# Altium PCB Candunio.PcbDoc (part 1 of 2)
Units mm, origin at the board's own origin, x right, y up, seen from the top; angles counter-clockwise.
Board outline 46 x 46 mm, 2 copper layers (Top Layer, Bottom Layer); 43 components, 53 nets, 183 pads, 133 vias.
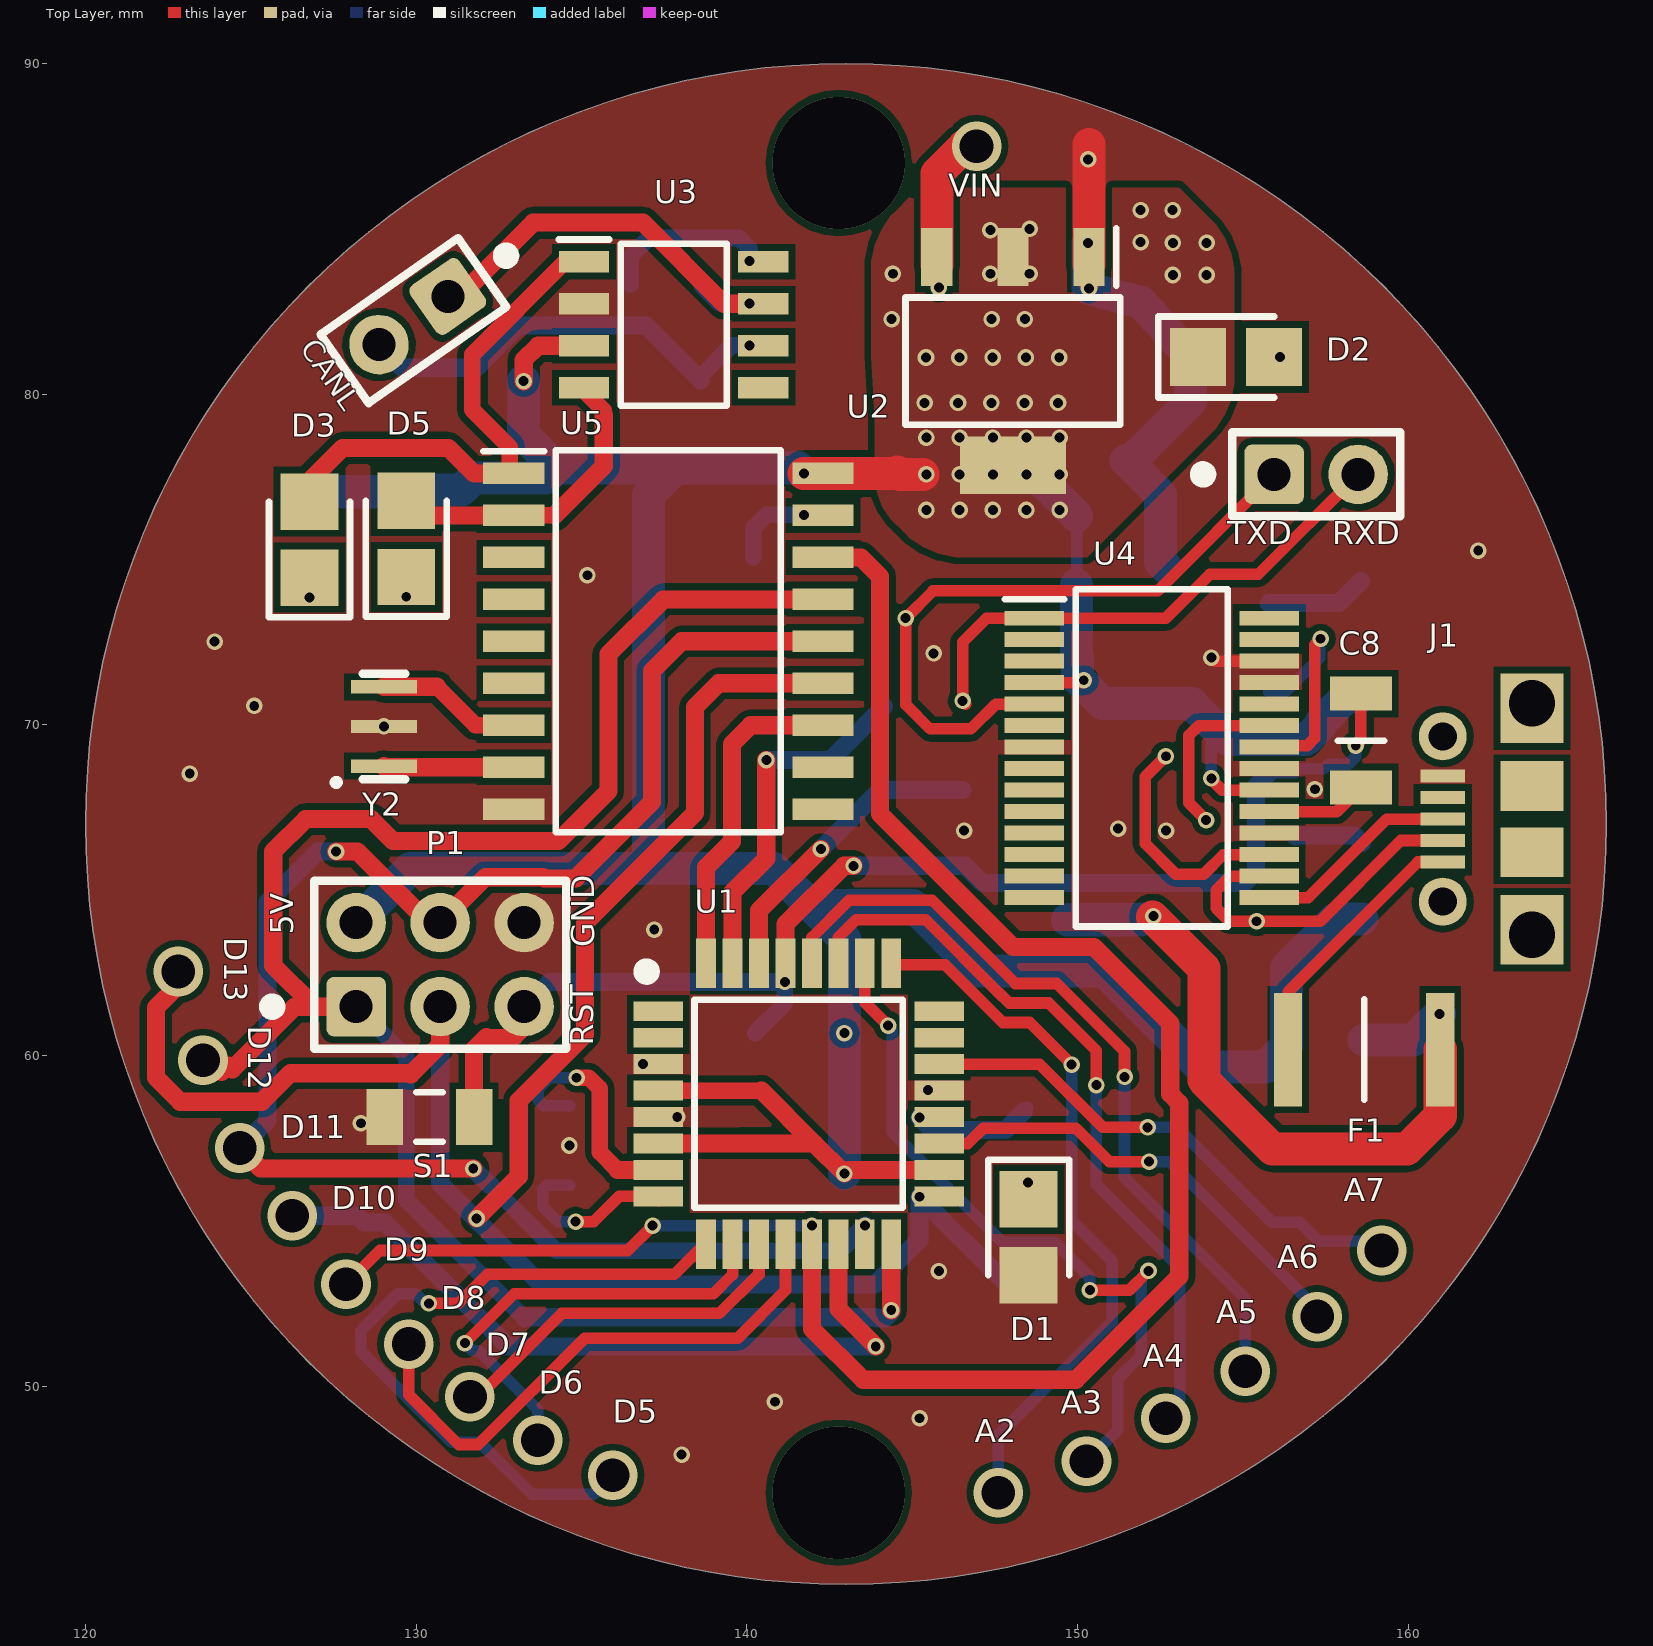
[diagram p0: Top Layer view]
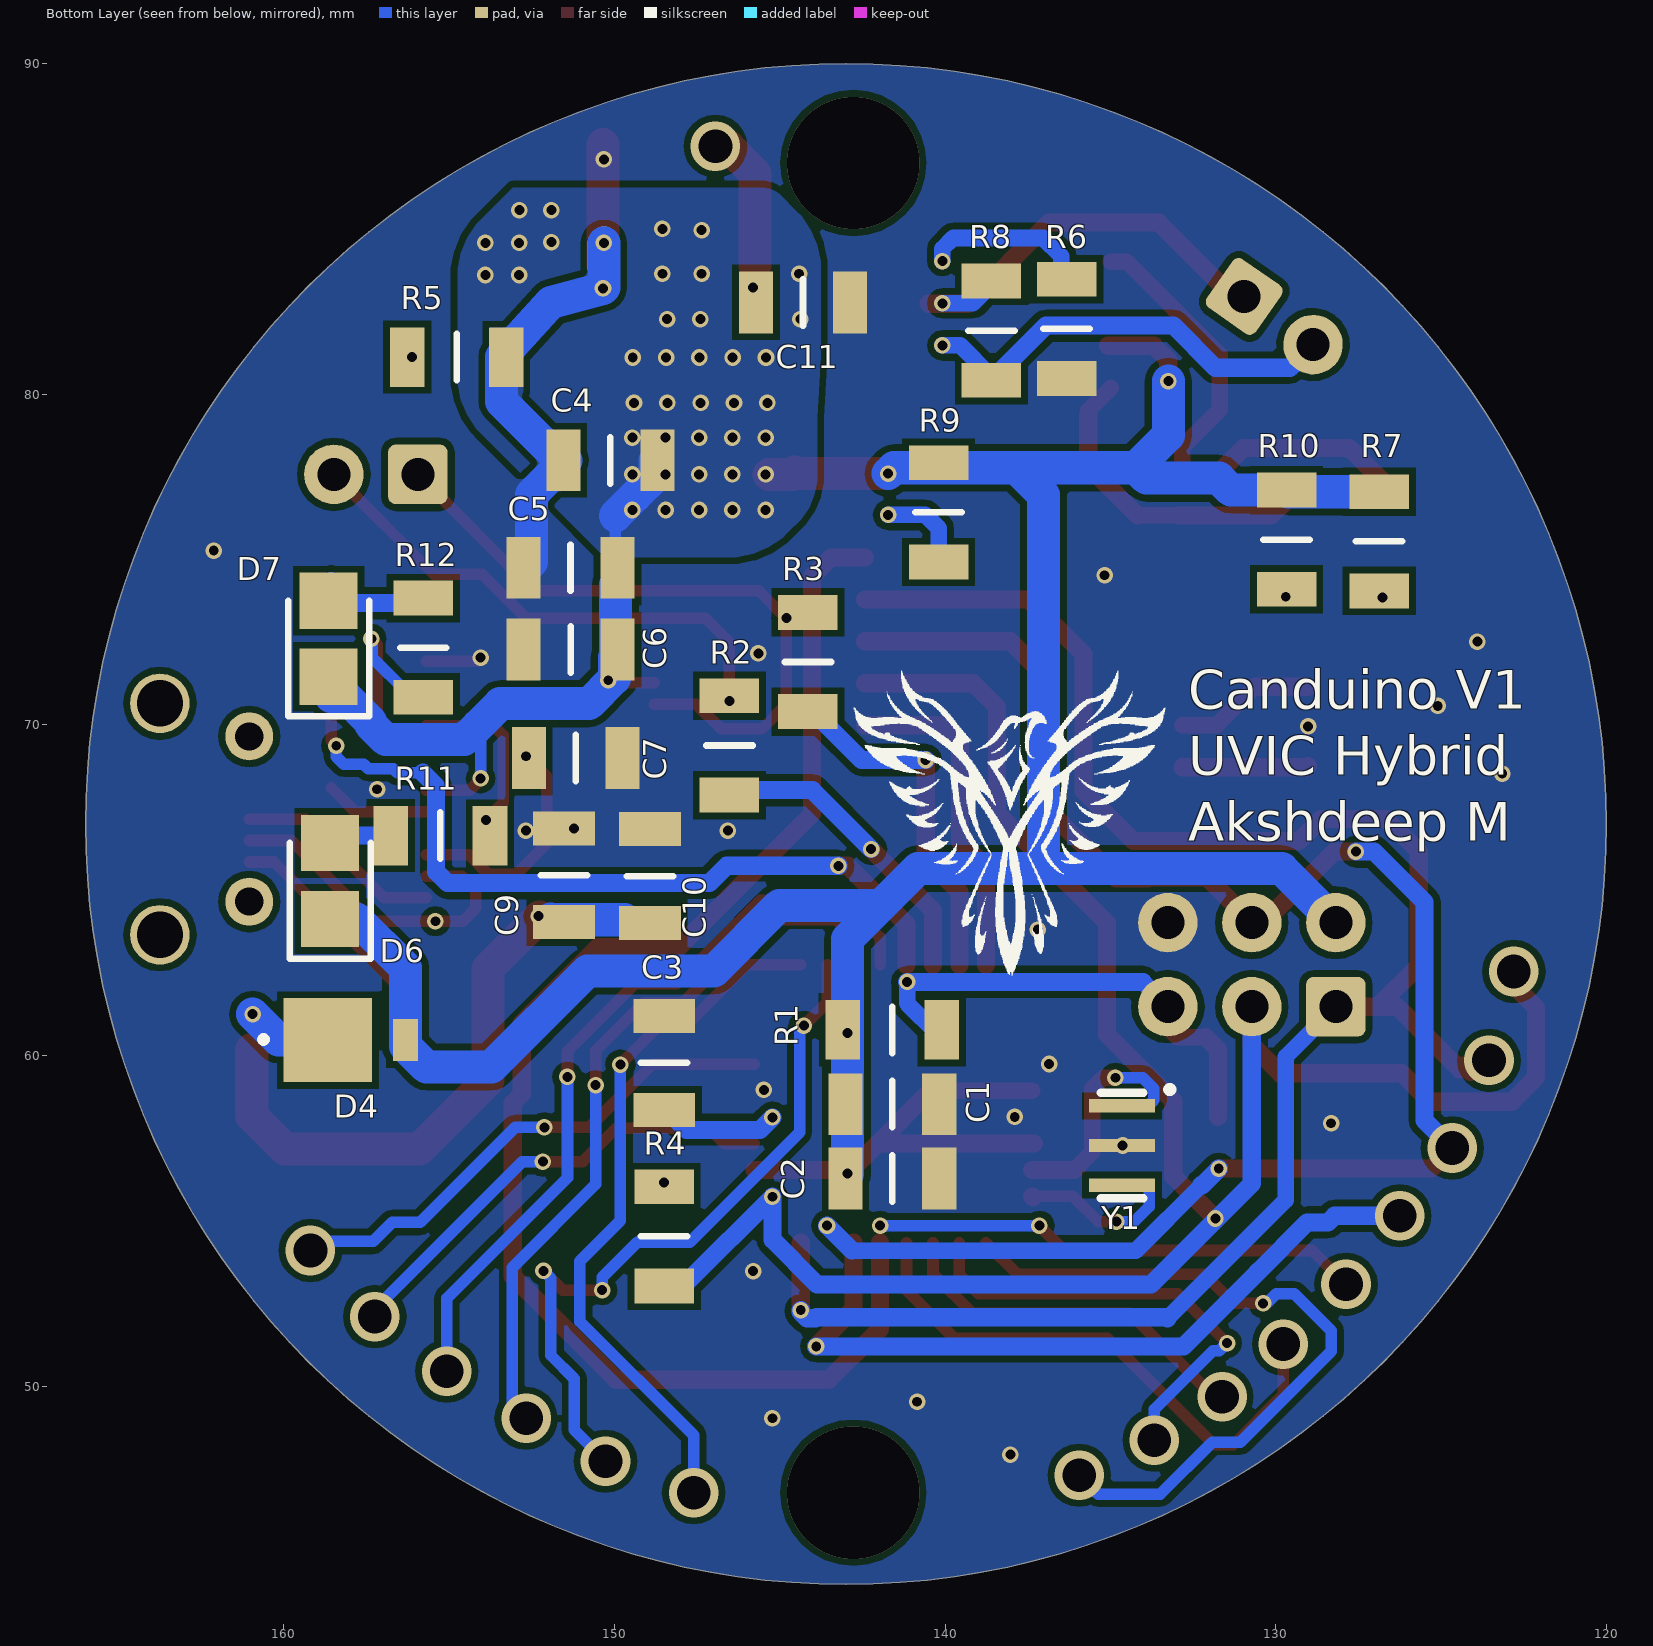
[diagram p1: Bottom Layer view, seen from below]

## Layer stack, top to bottom
Top Solder: solder mask 0.0102, Solder Resist, Dk 3.5
Top Layer: signal copper 0.0356
Dielectric 1: dielectric 0.32, FR-4, Dk 4.8
Bottom Layer: signal copper 0.0356
Bottom Solder: solder mask 0.0102, Solder Resist, Dk 3.5

## Board outline
120,67 cw(c143,67) 143,90 cw(c143,67) 166,67 cw(c143,67) 143,44 cw(c143,67) 120,67

## Design rules (kind name [scope] priority, off if disabled: settings)
Clearance [All] p1: gap=0.2 ignorepadtopadclearanceinfootprint=FALSE
MinimumSolderMaskSliver [All] p1: minsoldermaskwidth=0.07
PlaneConnect [All] p1: planeconnectstyle=Direct reliefexpansion=0.508 reliefentries=4 reliefconductorwidth=0.254 reliefairgap=0.254
PolygonConnect [All] p1: connectstyle=Direct reliefconductorwidth=0.254 reliefentries=4 polygonreliefangle="90 Angle" airgapwidth=0.254
RoutingVias [All] p1: holewidth=0.3 width=0.5 viastyle="Through Hole" minholewidth=0.3 minwidth=0.5 maxholewidth=0.3 maxwidth=0.5 viatemplateguid#1={BD94946F-5F4F-4AE1-884C-F64635037A37} viatemplatename#1=v50h30
SilkToSilkClearance [All] p1: silktosilkclearance=0.07
SilkToSolderMaskClearance [IsPad] p1: minsilkscreentomaskgap=0.07 clearancetoexposedcopper=TRUE
SolderMaskExpansion [All] p1: expansion=0.102
Width [All] p1: maxlimit=1 minlimit=0.35 preferedwidth=0.55
26 further rules are at their usual default settings.

## Components (designator, comment, footprint, x,y, rotation, side; value= is the part's Value field where it differs from the comment)
C1 "Cap Pol3" CAPC3216X170N 141.6,58.525 r180 bottom value=4.7uF
C2 "1uF" CAPC3216X170N 141.6,56.275 r180 bottom
C3 "Cap Semi" CAPC3216X170N 148.5,59.775 r90 bottom value=100nF
C4 "1uF" CAPC3216X170N 150.125,78 r0 bottom
C5 "Cap Pol3" CAPC3216X170N 151.333,74.752 r0 bottom value=4.7uF
C6 "Cap Semi" CAPC3216X170N 151.331,72.275 r0 bottom value=100nF
C7 "Cap Semi" CAPC3216X170N 151.175,69 r180 bottom value=100nF
C8 "Cap Semi" CAPC3216X170N 158.575,69.523 r270 top value=100nF
C9 "Cap Pol3" CAPC3216X170N 151.525,65.45 r90 bottom value=4.7uF
C10 "1uF" CAPC3216X170N 148.925,65.425 r90 bottom
C11 "Cap Pol3" CAPC3216X170N 144.3,82.775 r180 bottom value=4.7uF
CANL "CANOUT" "Pin Header 1x2 TH Pitch 2.54mm" 130.956,82.957 r215 top (schematic designator P3)
D1 "Red" LEDC3216X120NRED 148.525,54.5 r270 top
D2 "Green" LEDC3216X120NGRN 154.8,81.125 r0 top
D3 "Yellow" LEDC3216X120NYEL 126.773,75.6 r90 top
D4 "Diode" DO-220AA 157.976,60.463 r180 bottom
D5 "Yellow" LEDC3216X120NYEL 129.698,75.625 r90 top
D6 "Yellow" LEDC3216X120NYEL 158.605,65.275 r90 bottom
D7 "Yellow" LEDC3216X120NYEL 158.65,72.604 r90 bottom
F1 "Fuse 2" FUSC4632X85N 158.675,60.175 r180 top
J1 "USB micro B" 1050170001 163.75,67.15 r90 top
P1 "ICSP" "Pin Header 2x3 TH Pitch 2.54mm" 128.185,64.015 r0 top
R1 "1K" RESC3216X60N 141.6,60.775 r180 bottom
R2 "1K" RESC3216X60N 146.525,69.375 r90 bottom
R3 "1K" RESC3216X60N 144.15,71.9 r90 bottom
R4 "1K" RESC3216X60N 148.5,54.525 r270 bottom
R5 "1K" RESC3216X60N 154.775,81.125 r180 bottom
R6 "16.9K" RESC3216X60N 136.325,81.975 r90 bottom
R7 "1K" RESC3216X60N 126.873,75.55 r270 bottom
R8 "120" RESC3216X60N 138.6,81.925 r270 bottom
R9 "10K" RESC3216X60N 140.2,76.425 r90 bottom
R10 "1K" RESC3216X60N 129.673,75.6 r90 bottom
R11 "1K" RESC3216X60N 155.27,66.65 r0 bottom
R12 "1K" RESC3216X60N 155.787,72.333 r90 bottom
S1 "SW-PB" C1206 130.4,58.137 r180 top
"TXD    RXD" "Serial" "Pin Header 1x2 TH Pitch 2.54mm" 155.95,77.575 r0 top (schematic designator P2)
U1 "ATmega328P-AU" QFP80P900X900X120-32N 141.569,58.537 r0 top
U2 "LM1117IMPX-5.0" SOT230P700X180-4N 148.05,81 r270 top
U3 "MCP2551-E/SN" SOIC127P600X175-8N 137.787,82.1 r0 top
U4 "FT232RL-Reel" SOP65P780X200-28N 152.25,69 r0 top
U5 "MCP2515-E/ST" SOIC127P1030X265-18N 137.625,72.525 r0 top
Y1 "CSTCE16M0V53-R0" CSTCE_G 134.65,57.276 r90 bottom
Y2 "CSTCE16M0V53-R0" CSTCE_G 129.025,69.95 r270 top

## Footprints (in the part's own frame and the unit in brackets; to place one, negate y for a bottom-side part, rotate by r counter-clockwise, add the part's x,y. Pads: shape width x height; smd on the part's side, far side on the other; paste and mask are expansions set on the pad)
1050170001 [mm] "CONN USB MICRO MOLEX MODIFIED FOR DRILL HITS"
  round 1.8 hole 1.4: 0(-3.5,0) 0(3.5,0)
  rect 2.1x1.9 smd: 0(-3.35,0) 0(3.35,0)
  round 1.45 hole 0.85: 0(-2.5,2.7) 0(2.5,2.7)
  rect 1.5x1.9 smd: 0(-1,0) 0(1,0)
  rect 0.4x1.35 smd: 1(-1.3,2.7) 2(-0.65,2.7) 3(0,2.7) 4(0.65,2.7) 5(1.3,2.7)
  body extent -4.1,-2.5 4.1,2.9, height 2.78
C1206 [mm] "Chip Capacitor, Body 3.2x1.6mm, IPC High Density"
  rect 1.1x1.7 smd: 1(-1.35,0) 2(1.35,0)
  silkscreen extent -0.4,-0.75 0.4,0.75, body extent -1.7,-0.9 1.7,0.9, height 1.3
CAPC3216X170N [mm]
  rect 1.03x1.87 smd: 1(-1.42,0) 2(1.42,0)
  silkscreen extent 0,-0.7 0,0.7, body extent -1.6,-0.8 1.6,0.8, height 1.7
CSTCE_G [mm]
  rect 0.4x2 smd: 1(1.2,0) 2(0,0) 3(-1.2,0)
  silkscreen extent -1.6,-1.52 1.77,0.65, body extent -1.6,-0.65 1.6,0.65, height 0.7
DO-220AA [mil]
  rect 105.12x100 smd: 1(-27.5,0)
  rect 30x50 smd: 2(65.06,0)
  silkscreen extent -107,-2 -102,3, body extent -76,-40 76,40, height 39
FUSC4632X85N [mm]
  rect 0.85x3.43 smd: 1(-2.3,0) 2(2.3,0)
  silkscreen extent 0,-1.52 0,1.52, body extent -2.27,-1.62 2.28,1.62, height 0.85
LEDC3216X120NGRN [mm]
  rect 1.7x1.75 smd: 1(-1.15,0) 2(1.15,0)
  silkscreen extent -2.35,-1.22 1.15,1.22, body extent -1.6,-0.8 1.6,0.8, height 1.1
LEDC3216X120NRED [mm]
  rect 1.7x1.75 smd: 1(-1.15,0) 2(1.15,0)
  silkscreen extent -2.35,-1.22 1.15,1.22, body extent -1.6,-0.8 1.6,0.8, height 1.1
LEDC3216X120NYEL [mm]
  rect 1.7x1.75 smd: 1(-1.15,0) 2(1.15,0)
  silkscreen extent -2.35,-1.22 1.15,1.22, body extent -1.6,-0.8 1.6,0.8, height 1.1
"Pin Header 1x2 TH Pitch 2.54mm" [mm] "PinHeader 1x2 TH Pitch 2.54mm"
  rrect25% 1.8x1.8 hole 1: 1(0,0)
  round 1.8 hole 1: 2(2.54,0)
  silkscreen extent -2.3,-1.27 3.81,1.27, body extent -1.27,-1.27 3.81,1.27, height 9.5
"Pin Header 2x3 TH Pitch 2.54mm" [mm] "PinHeader 1x3 TH Pitch 2.54mm"
  rrect25% 1.8x1.8 hole 1: 1(0,-2.54)
  round 1.8 hole 1: 2(2.54,-2.54) 3(5.08,-2.54) 4(0,0) 5(2.54,0) 6(5.08,0)
  silkscreen extent -2.69,-3.81 6.35,1.27, body extent -1.27,-3.81 6.35,1.27, height 9.5
QFP80P900X900X120-32N [mm]
  rect 1.5x0.6 smd: 1(-4.25,2.8) 2(-4.25,2) 3(-4.25,1.2) 4(-4.25,0.4) 5(-4.25,-0.4) 6(-4.25,-1.2) 7(-4.25,-2) 8(-4.25,-2.8) 17(4.25,-2.8) 18(4.25,-2) 19(4.25,-1.2) 20(4.25,-0.4) 21(4.25,0.4) 22(4.25,1.2) 23(4.25,2) 24(4.25,2.8)
  rect 0.6x1.5 smd: 9(-2.8,-4.25) 10(-2,-4.25) 11(-1.2,-4.25) 12(-0.4,-4.25) 13(0.4,-4.25) 14(1.2,-4.25) 15(2,-4.25) 16(2.8,-4.25) 25(2.8,4.25) 26(2,4.25) 27(1.2,4.25) 28(0.4,4.25) 29(-0.4,4.25) 30(-1.2,4.25) 31(-2,4.25) 32(-2.8,4.25)
  silkscreen extent -4.8,-3.15 3.15,4.2, body extent -4.5,-4.5 4.5,4.5, height 1.2
RESC3216X60N [mm]
  rect 1.05x1.8 smd: 1(-1.5,0) 2(1.5,0)
  silkscreen extent 0,-0.7 0,0.7, body extent -1.57,-0.83 1.58,0.77, height 1.2
SOIC127P600X175-8N [mm]
  rect 1.525x0.65 smd: 1(-2.712,1.905) 2(-2.712,0.635) 3(-2.712,-0.635) 4(-2.712,-1.905) 5(2.712,-1.905) 6(2.712,-0.635) 7(2.712,0.635) 8(2.712,1.905)
  silkscreen extent -3.47,-2.45 1.6,2.58, body extent -3,-2.45 3,2.45, height 1.75
SOIC127P1030X265-18N [mm]
  rect 1.85x0.65 smd: 1(-4.675,5.08) 2(-4.675,3.81) 3(-4.675,2.54) 4(-4.675,1.27) 5(-4.675,0) 6(-4.675,-1.27) 7(-4.675,-2.54) 8(-4.675,-3.81) 9(-4.675,-5.08) 10(4.675,-5.08) 11(4.675,-3.81) 12(4.675,-2.54) 13(4.675,-1.27) 14(4.675,0) 15(4.675,1.27) 16(4.675,2.54) 17(4.675,3.81) 18(4.675,5.08)
  silkscreen extent -5.6,-5.77 3.4,5.77, body extent -5.15,-5.77 5.15,5.78, height 2.65
SOP65P780X200-28N [mm]
  rect 1.8x0.45 smd: 1(-3.55,4.225) 2(-3.55,3.575) 3(-3.55,2.925) 4(-3.55,2.275) 5(-3.55,1.625) 6(-3.55,0.975) 7(-3.55,0.325) 8(-3.55,-0.325) 9(-3.55,-0.975) 10(-3.55,-1.625) 11(-3.55,-2.275) 12(-3.55,-2.925) 13(-3.55,-3.575) 14(-3.55,-4.225) 15(3.55,-4.225) 16(3.55,-3.575) 17(3.55,-2.925) 18(3.55,-2.275) 19(3.55,-1.625) 20(3.55,-0.975) 21(3.55,-0.325) 22(3.55,0.325) 23(3.55,0.975) 24(3.55,1.625) 25(3.55,2.275) 26(3.55,2.925) 27(3.55,3.575) 28(3.55,4.225)
  silkscreen extent -4.45,-5.1 2.3,5.1, body extent -3.9,-5.1 3.9,5.1, height 2
SOT230P700X180-4N [mm]
  rect 1.75x0.95 smd: 1(-3.15,2.3) 2(-3.15,0) 3(-3.15,-2.3)
  rect 1.75x3.2 smd: 4(3.15,0)
  silkscreen extent -4.03,-3.25 1.92,3.25, body extent -3.64,-3.35 3.65,3.35, height 1.81

## Part data
C1 C5 C9 C11: "Polarized Capacitor (Surface Mount)", Capacitance=4.7uF, Case/Package=1206, Case Code (Metric)=3216, Dielectric=X7R, Manufacturer="Kyocera AVX", Manufacturer Part Number=12063C475KAT2A, Max Operating Temperature=125°C, Min Operating Temperature=-55°C, Package Quantity=1, Supplier Part Number=1276-1055-1-ND, Tolerance=10%, Voltage=25V, Case Code (Imperial)=1206, ComponentLink1Description=https://datasheet.ciiva.com/2988/cx7r-2988115.pdf, ComponentLink1URL=https://datasheet.ciiva.com/2988/cx7r-2988115.pdf, ComponentLink2Description=https://datasheet.ciiva.com/7833/84526-7833366.pdf, ComponentLink2URL=https://datasheet.ciiva.com/7833/84526-7833366.pdf, ComponentLink3Description=https://datasheet.ciiva.com/16315/cx7r-16315830.pdf, ComponentLink3URL=https://datasheet.ciiva.com/16315/cx7r-16315830.pdf, ComponentLink4Description=https://datasheet.ciiva.com/153/cx7r-153207.pdf, ComponentLink4URL=https://datasheet.ciiva.com/153/cx7r-153207.pdf, ComponentLink5Description=https://datasheet.ciiva.com/7833/84526-7833367.pdf, ComponentLink5URL=https://datasheet.ciiva.com/7833/84526-7833367.pdf, ComponentLink6Description=https://datasheet.ciiva.com/153/cx7r-153208.pdf, ComponentLink6URL=https://datasheet.ciiva.com/153/cx7r-153208.pdf, ComponentLink7Description=https://datasheet.ciiva.com/7833/cx7r-7833368.pdf, ComponentLink7URL=https://datasheet.ciiva.com/7833/cx7r-7833368.pdf, ComponentLink8Description=https://datasheet.ciiva.com/153/cx7r-153209.pdf, ComponentLink8URL=https://datasheet.ciiva.com/153/cx7r-153209.pdf, ComponentLink9Description=https://datasheet.ciiva.com/5417/cx7r-218113-5417949.pdf, ComponentLink9URL=https://datasheet.ciiva.com/5417/cx7r-218113-5417949.pdf, ComponentLink10Description=https://datasheet.ciiva.com/28611/cx7r-28611725.pdf, ComponentLink10URL=https://datasheet.ciiva.com/28611/cx7r-28611725.pdf, ComponentLink11Description=https://datasheet.ciiva.com/11786/0900766b80dc2409-11786382.pdf, ComponentLink11URL=https://datasheet.ciiva.com/11786/0900766b80dc2409-11786382.pdf, Contact Plating=Tin,Matte, Depth=1.6mm, Height=1.78mm, LatestRevisionDate=29-May-2009, LatestRevisionNote="IPC-7351 Footprint Added.", Lead Free="Lead Free", Length=3.2mm, Mount="Surface Mount", Number of Pins=2, PackageDescription="Chip Capacitor", PackageReference=C0805, Packaging="Tape and Reel", Pricing 1="1=0.5, 10=0.345, 100=0.207, 500=0.15526, 1000=0.1311 (USD)", Published=8-Jun-2000, Publisher="Altium Limited", Radiation Hardening=No, REACH SVHC="No SVHC", Stock 1=0, Supplier 1=Digi-Key, Supplier 2=Digi-Key, Termination=SMD/SMT, Thickness=0.07inch, Voltage Rating=25V, Voltage Rating (DC)=25V, Width=0.063inch
C2 C4 C10: library part "Cap Semi", "Capacitor (Semiconductor SIM Model)", Case/Package=1206, Case Code (Metric)=3216, Dielectric=X7R, Manufacturer=Murata, Manufacturer Part Number=GRM31MR71H105KA88L, Max Operating Temperature=125°C, Min Operating Temperature=-55°C, Package Quantity=1, Supplier Part Number=1276-3086-1-ND, Tolerance=10%, Voltage=50V, Capacitance=1uF, Case Code (Imperial)=1206, ComponentLink1Description=https://datasheet.ciiva.com/16379/product-16379616.pdf, ComponentLink1URL=https://datasheet.ciiva.com/16379/product-16379616.pdf, ComponentLink2Description=https://datasheet.ciiva.com/14116/nmgrm-data-en-14116709.pdf, ComponentLink2URL=https://datasheet.ciiva.com/14116/nmgrm-data-en-14116709.pdf, ComponentLink3Description=https://datasheet.ciiva.com/22703/608985-22703384.pdf, ComponentLink3URL=https://datasheet.ciiva.com/22703/608985-22703384.pdf, ComponentLink4Description=https://datasheet.ciiva.com/3777/42grm31mr71h105ka8823-3777081.pdf, ComponentLink4URL=https://datasheet.ciiva.com/3777/42grm31mr71h105ka8823-3777081.pdf, ComponentLink5Description=https://datasheet.ciiva.com/6270/partnumbering-e-01-6270398.pdf, ComponentLink5URL=https://datasheet.ciiva.com/6270/partnumbering-e-01-6270398.pdf, ComponentLink6Description=https://datasheet.ciiva.com/6270/partnumbering-e-01-6270399.pdf, ComponentLink6URL=https://datasheet.ciiva.com/6270/partnumbering-e-01-6270399.pdf, ComponentLink7Description=https://datasheet.ciiva.com/29199/455056-da-01-en-vs-kondensator-1206-29199449.pdf, ComponentLink7URL=https://datasheet.ciiva.com/29199/455056-da-01-en-vs-kondensator-1206-29199449.pdf, ComponentLink8Description=https://datasheet.ciiva.com/29202/450923-da-01-de-vs-chip-kond-1206-1-0-uf-10pr-50-0v-x7r-29202718.pdf, ComponentLink8URL=https://datasheet.ciiva.com/29202/450923-da-01-de-vs-chip-kond-1206-1-0-uf-10pr-50-0v-x7r-29202718.pdf, Depth=1.6mm, Height=1.15mm, LatestRevisionDate=29-May-2009, LatestRevisionNote="IPC-7351 Footprint Added.", Lead Free="Lead Free", Length=3.2mm, Material=Ceramic, Mount="Surface Mount", Number of Pins=2, PackageDescription="Chip Capacitor", PackageReference=C1206, Packaging="Tape and Reel", Published=8-Jun-2000, Publisher="Altium Limited", REACH SVHC="No SVHC", Stock 1=0, Supplier 1=Digi-Key, Supplier 2=Digi-Key, Termination=SMD/SMT, Thickness=0.049inch, Voltage Rating=50V, Voltage Rating (DC)=50V, Width=0.063inch
C3 C6 C7 C8: "Capacitor (Semiconductor SIM Model)", Capacitance=100nF, Case/Package=1206, Case Code (Metric)=3216, Dielectric=X7R, Dielectric Material=Ceramic, Manufacturer=Yageo, Manufacturer Part Number=CC1206KKX7R0BB104, Max Operating Temperature=125°C, Min Operating Temperature=-55°C, Package Quantity=1, Supplier Part Number=1276-1151-1-ND, Tolerance=10%, Voltage=63V, Voltage Rating=100V, Case Code (Imperial)=1206, ComponentLink1Description=https://datasheet.ciiva.com/180/mlccorderingcode-180144.pdf, ComponentLink1URL=https://datasheet.ciiva.com/180/mlccorderingcode-180144.pdf, ComponentLink2Description=https://datasheet.ciiva.com/180/mlccorderingcode-180145.pdf, ComponentLink2URL=https://datasheet.ciiva.com/180/mlccorderingcode-180145.pdf, ComponentLink3Description=https://datasheet.ciiva.com/180/mlccorderingcode-180146.pdf, ComponentLink3URL=https://datasheet.ciiva.com/180/mlccorderingcode-180146.pdf, ComponentLink4Description=https://datasheet.ciiva.com/7978/1447671-7978227.pdf, ComponentLink4URL=https://datasheet.ciiva.com/7978/1447671-7978227.pdf, ComponentLink5Description=https://datasheet.ciiva.com/5425/upy-gp-np0-16v-to-50v-8-5425573.pdf, ComponentLink5URL=https://datasheet.ciiva.com/5425/upy-gp-np0-16v-to-50v-8-5425573.pdf, ComponentLink6Description=https://datasheet.ciiva.com/26829/getdatasheetpartid-403790-26829655.pdf, ComponentLink6URL=https://datasheet.ciiva.com/26829/getdatasheetpartid-403790-26829655.pdf, ComponentLink7Description=https://datasheet.ciiva.com/46391/1919308-46391993.pdf, ComponentLink7URL=https://datasheet.ciiva.com/46391/1919308-46391993.pdf, ComponentLink8Description=https://datasheet.ciiva.com/16981/upy-np0x7r-mv-100-to-630v-9-16981180.pdf, ComponentLink8URL=https://datasheet.ciiva.com/16981/upy-np0x7r-mv-100-to-630v-9-16981180.pdf, Composition=Ceramic, Depth=1.6mm, Height=1.25mm, LatestRevisionDate=29-May-2009, LatestRevisionNote="IPC-7351 Footprint Added.", Lead Free="Lead Free", Length=3.2mm, Mount="Surface Mount", Number of Pins=2, PackageDescription="Chip Capacitor", PackageReference=C1206, Packaging="Tape and Reel", Pricing 1="1=0.32, 10=0.221, 100=0.1117, 500=0.07646, 1000=0.06763 (USD)", Published=8-Jun-2000, Publisher="Altium Limited", Radiation Hardening=No, REACH SVHC="No SVHC", Stock 1=0, Supplier 1=Digi-Key, Supplier 2=Digi-Key, Termination=SMD/SMT, Thickness=0.057inch, Voltage Rating (DC)=100V, Width=0.063inch
CANL "TXD    RXD": library part "Header 2", "Header, 2-Pin", LatestRevisionDate=17-Jul-2002, LatestRevisionNote="Re-released for DXP Platform.", Publisher="Altium Limited"
D1: library part LED2, "Typical RED, GREEN, YELLOW, AMBER GaAs LED", Case/Package=1206, Case Code (Metric)=3216, Colour=Yellow, Forward Current=20mA, Forward Voltage=2.1V, Lens Colour=White,Clear, Manufacturer="Broadcom Avago", Manufacturer Part Number=HSMY-C150, Max Operating Temperature=85°C, Max Power Dissipation=65mW, Min Operating Temperature=-40°C, Package Quantity=1, Reverse Voltage=5V, Supplier Part Number=732-4992-1-ND, Case Code (Imperial)=1206, ComponentLink1Description=https://datasheet.ciiva.com/15117/getdatasheetpartid-110528-15117488.pdf, ComponentLink1URL=https://datasheet.ciiva.com/15117/getdatasheetpartid-110528-15117488.pdf, ComponentLink2Description=https://datasheet.ciiva.com/11774/0900766b804a6539-11774578.pdf, ComponentLink2URL=https://datasheet.ciiva.com/11774/0900766b804a6539-11774578.pdf, ComponentLink3Description=https://datasheet.ciiva.com/19466/1557071-19466435.pdf, ComponentLink3URL=https://datasheet.ciiva.com/19466/1557071-19466435.pdf, ComponentLink4Description=https://datasheet.ciiva.com/14172/swseriehsmx-c150toc190-e-14172159.pdf, ComponentLink4URL=https://datasheet.ciiva.com/14172/swseriehsmx-c150toc190-e-14172159.pdf, ComponentLink5Description=https://datasheet.ciiva.com/29280/180507-da-01-en-chip-led-hsmy-c150-gelb-29280997.pdf, ComponentLink5URL=https://datasheet.ciiva.com/29280/180507-da-01-en-chip-led-hsmy-c150-gelb-29280997.pdf, ComponentLink6Description=https://datasheet.ciiva.com/11773/0900766b804a6539-11773956.pdf, ComponentLink6URL=https://datasheet.ciiva.com/11773/0900766b804a6539-11773956.pdf, ComponentLink7Description=https://datasheet.ciiva.com/15117/getdatasheetpartid-142358-15117749.pdf, ComponentLink7URL=https://datasheet.ciiva.com/15117/getdatasheetpartid-142358-15117749.pdf, ComponentLink8Description=https://datasheet.ciiva.com/46426/313031-46426533.pdf, ComponentLink8URL=https://datasheet.ciiva.com/46426/313031-46426533.pdf, ComponentLink9Description=https://datasheet.ciiva.com/14172/swseriehsmx-c150toc190-e-14172156.pdf, ComponentLink9URL=https://datasheet.ciiva.com/14172/swseriehsmx-c150toc190-e-14172156.pdf, ComponentLink10Description=https://datasheet.ciiva.com/29281/180509-da-01-en-chip-led-hsmh-c150-rot-29281009.pdf, ComponentLink10URL=https://datasheet.ciiva.com/29281/180509-da-01-en-chip-led-hsmh-c150-rot-29281009.pdf, Contact Plating=Gold, Depth=1.6mm, Dominant Wavelength=586nm, Height=1.1mm, Illumination Colour=Yellow, LatestRevisionDate=17-Jul-2002, LatestRevisionNote="Re-released for DXP Platform.", Lead Free="Lead Free", Length=3.2mm, Lens Style=Diffused,Colorless,Rectangular, Lens Transparency=Diffused, Luminous Intensity=8mcd, Mount="Surface Mount", Number of Elements=1, Number of LEDs=1, Number of Pins=2, PackageDescription="SM LED; 2 Flat Leads", PackageReference=3.2X1.6X1.1, PackageVersion=Feb-2002, Packaging="Tape and Reel", Power Dissipation=65mW, Power Rating=65mW, Published=8-Jun-2000, Publisher="Altium Limited", Radiation Hardening=No, REACH SVHC="No SVHC", Stock 1=0, Stock 2=0, Supplier 1=Digi-Key, Supplier 2=Digi-Key, Supplier 3=Digi-Key, Supplier 4=Digi-Key, Test Current=20mA, Viewing Angle=170°, Voltage Rating (DC)=2.1V, Wavelength=586nm, Width=1.6mm
D2: library part LED2, "Typical RED, GREEN, YELLOW, AMBER GaAs LED", Case/Package=1206, Case Code (Metric)=3216, Colour=Green,Yellow, Forward Current=20mA, Forward Voltage=2.2V, Lens Colour=White,Clear, Manufacturer="Broadcom Avago", Manufacturer Part Number=HSMG-C150, Max Operating Temperature=85°C, Max Power Dissipation=65mW, Min Operating Temperature=-30°C, Package Quantity=1, Reverse Voltage=5V, Supplier Part Number=732-4993-1-ND, Case Code (Imperial)=1206, ComponentLink1Description=https://datasheet.ciiva.com/11774/0900766b804a6539-11774272.pdf, ComponentLink1URL=https://datasheet.ciiva.com/11774/0900766b804a6539-11774272.pdf, ComponentLink2Description=https://datasheet.ciiva.com/14172/swseriehsmx-c150toc190-e-14172162.pdf, ComponentLink2URL=https://datasheet.ciiva.com/14172/swseriehsmx-c150toc190-e-14172162.pdf, ComponentLink3Description=https://datasheet.ciiva.com/46426/313031-46426517.pdf, ComponentLink3URL=https://datasheet.ciiva.com/46426/313031-46426517.pdf, ComponentLink4Description=https://datasheet.ciiva.com/15117/getdatasheetpartid-110366-15117482.pdf, ComponentLink4URL=https://datasheet.ciiva.com/15117/getdatasheetpartid-110366-15117482.pdf, ComponentLink5Description=https://datasheet.ciiva.com/19466/1556369-19466015.pdf, ComponentLink5URL=https://datasheet.ciiva.com/19466/1556369-19466015.pdf, ComponentLink6Description=https://datasheet.ciiva.com/29280/180668-da-01-en-chip-led-hsmg-c150-gelb-gruen-29280632.pdf, ComponentLink6URL=https://datasheet.ciiva.com/29280/180668-da-01-en-chip-led-hsmg-c150-gelb-gruen-29280632.pdf, Contact Plating=Gold, Depth=1.6mm, Dominant Wavelength=572nm, Height=1.1mm, Illumination Colour=Green, LatestRevisionDate=17-Jul-2002, LatestRevisionNote="Re-released for DXP Platform.", Length=3.2mm, Lens Style=Diffused,Colorless,Rectangular, Lens Transparency=Diffused, Luminous Intensity=15mcd, Mount="Surface Mount", Number of Elements=1, Number of LEDs=1, Number of Pins=2, PackageDescription="SM LED; 2 Flat Leads", PackageReference=3.2X1.6X1.1, PackageVersion=Feb-2002, Packaging="Tape and Reel", Power Dissipation=65mW, Power Rating=65mW, Published=8-Jun-2000, Publisher="Altium Limited", Radiation Hardening=No, REACH SVHC="No SVHC", Supplier 1=Digi-Key, Supplier 2=Digi-Key, Test Current=20mA, Viewing Angle=170°, Wavelength=572nm, Width=1.6mm
D3 D5 D6 D7: library part LED2, "Typical RED, GREEN, YELLOW, AMBER GaAs LED", Case/Package=1206, Case Code (Metric)=3216, Forward Current=20mA, Forward Voltage=2.1V, Lens Colour=White,Clear, Manufacturer="Broadcom Avago", Manufacturer Part Number=HSMY-C150, Max Operating Temperature=85°C, Max Power Dissipation=65mW, Min Operating Temperature=-40°C, Package Quantity=1, Reverse Voltage=5V, Supplier Part Number=732-4994-1-ND, Case Code (Imperial)=1206, Colour=Yellow, ComponentLink1Description=https://datasheet.ciiva.com/15117/getdatasheetpartid-110528-15117488.pdf, ComponentLink1URL=https://datasheet.ciiva.com/15117/getdatasheetpartid-110528-15117488.pdf, ComponentLink2Description=https://datasheet.ciiva.com/11774/0900766b804a6539-11774578.pdf, ComponentLink2URL=https://datasheet.ciiva.com/11774/0900766b804a6539-11774578.pdf, ComponentLink3Description=https://datasheet.ciiva.com/19466/1557071-19466435.pdf, ComponentLink3URL=https://datasheet.ciiva.com/19466/1557071-19466435.pdf, ComponentLink4Description=https://datasheet.ciiva.com/14172/swseriehsmx-c150toc190-e-14172159.pdf, ComponentLink4URL=https://datasheet.ciiva.com/14172/swseriehsmx-c150toc190-e-14172159.pdf, ComponentLink5Description=https://datasheet.ciiva.com/29280/180507-da-01-en-chip-led-hsmy-c150-gelb-29280997.pdf, ComponentLink5URL=https://datasheet.ciiva.com/29280/180507-da-01-en-chip-led-hsmy-c150-gelb-29280997.pdf, Contact Plating=Gold, Depth=1.6mm, Dominant Wavelength=586nm, Height=1.1mm, Illumination Colour=Yellow, LatestRevisionDate=17-Jul-2002, LatestRevisionNote="Re-released for DXP Platform.", Lead Free="Lead Free", Length=3.2mm, Lens Style=Diffused,Colorless,Rectangular, Lens Transparency=Diffused, Luminous Intensity=8mcd, Mount="Surface Mount", Number of Elements=1, Number of LEDs=1, Number of Pins=2, PackageDescription="SM LED; 2 Flat Leads", PackageReference=3.2X1.6X1.1, PackageVersion=Feb-2002, Packaging="Tape and Reel", Power Dissipation=65mW, Power Rating=65mW, Published=8-Jun-2000, Publisher="Altium Limited", Radiation Hardening=No, REACH SVHC="No SVHC", Stock 1=0, Supplier 1=Digi-Key, Supplier 2=Digi-Key, Test Current=20mA, Viewing Angle=170°, Voltage Rating (DC)=2.1V, Wavelength=586nm, Width=1.6mm
D4: "Default Diode", Supplier Part Number=SS1P3L-M3/84AGICT-ND, Code_JEDEC=DO-214-AB, LatestRevisionDate=17-Jul-2002, LatestRevisionNote="Re-released for DXP Platform.", PackageDescription="DO-214-AB/SMC; 2 C-Bend Leads; Body 7.9 x 5.9 mm, inc. leads (LxW)", PackageReference=SMC, PackageVersion=Sep-1996, Published=8-Jun-2000, Publisher="Altium Limited", Supplier 1=Digi-Key, Supplier 2=Digi-Key
F1: "Fuse", Case/Package=1812, Case Code (Metric)=4532, Current Rating=100A, Hold Current=500mA, Manufacturer=Bourns, Manufacturer Part Number=MF-MSMF050-2, Max Operating Temperature=85°C, Min Operating Temperature=-40°C, Operating Supply Voltage=15V, Package Quantity=2000, Power Dissipation=800mW, Resistance=150mR, Supplier Part Number=?MF-MSMF050-2CT-ND, Trip Current=1A, Approvals=UL,CSA,TUV, Case Code (Imperial)=1812, ComponentLink1Description=https://datasheet.ciiva.com/326/mfmsmf-326354.pdf, ComponentLink1URL=https://datasheet.ciiva.com/326/mfmsmf-326354.pdf, ComponentLink2Description=https://datasheet.ciiva.com/1228/1786007-1228155.pdf, ComponentLink2URL=https://datasheet.ciiva.com/1228/1786007-1228155.pdf, ComponentLink3Description=https://datasheet.ciiva.com/16205/mfmsmf-16205994.pdf, ComponentLink3URL=https://datasheet.ciiva.com/16205/mfmsmf-16205994.pdf, ComponentLink4Description=https://datasheet.ciiva.com/34302/1164200-34302041.pdf, ComponentLink4URL=https://datasheet.ciiva.com/34302/1164200-34302041.pdf, ComponentLink5Description=https://datasheet.ciiva.com/14537/70153434-14537737.pdf, ComponentLink5URL=https://datasheet.ciiva.com/14537/70153434-14537737.pdf, ComponentLink6Description=https://datasheet.ciiva.com/46395/1695373-46395287.pdf, ComponentLink6URL=https://datasheet.ciiva.com/46395/1695373-46395287.pdf, ComponentLink7Description=https://datasheet.ciiva.com/22749/1695373-22749079.pdf, ComponentLink7URL=https://datasheet.ciiva.com/22749/1695373-22749079.pdf, ComponentLink8Description=https://datasheet.ciiva.com/32426/mf-msmf-series-eng-tds-32426126.pdf, ComponentLink8URL=https://datasheet.ciiva.com/32426/mf-msmf-series-eng-tds-32426126.pdf, ComponentLink9Description=https://datasheet.ciiva.com/4501/mfmsmf-72300-4501655.pdf, ComponentLink9URL=https://datasheet.ciiva.com/4501/mfmsmf-72300-4501655.pdf, ComponentLink10Description=https://datasheet.ciiva.com/3019/mfmsmf-3019622.pdf, ComponentLink10URL=https://datasheet.ciiva.com/3019/mfmsmf-3019622.pdf, ComponentLink11Description=https://datasheet.ciiva.com/3019/mfmsmf-3019621.pdf, ComponentLink11URL=https://datasheet.ciiva.com/3019/mfmsmf-3019621.pdf, ComponentLink12Description=https://datasheet.ciiva.com/326/mfmsmf-326356.pdf, ComponentLink12URL=https://datasheet.ciiva.com/326/mfmsmf-326356.pdf, ComponentLink13Description=https://datasheet.ciiva.com/1274/1786007-1274499.pdf, ComponentLink13URL=https://datasheet.ciiva.com/1274/1786007-1274499.pdf, ComponentLink14Description=https://datasheet.ciiva.com/326/mfmsmf-326355.pdf, ComponentLink14URL=https://datasheet.ciiva.com/326/mfmsmf-326355.pdf, ComponentLink15Description=https://datasheet.ciiva.com/1274/1786007-1274498.pdf, ComponentLink15URL=https://datasheet.ciiva.com/1274/1786007-1274498.pdf, ComponentLink16Description=https://datasheet.ciiva.com/15226/getdatasheetpartid-117168-15226886.pdf, ComponentLink16URL=https://datasheet.ciiva.com/15226/getdatasheetpartid-117168-15226886.pdf, ComponentLink17Description=https://datasheet.ciiva.com/25894/mfmsmf-25894175.pdf, ComponentLink17URL=https://datasheet.ciiva.com/25894/mfmsmf-25894175.pdf, Contact Plating=Gold, Height=0.85mm, LatestRevisionDate=17-Jul-2002, LatestRevisionNote="Re-released for DXP Platform.", Lead Free="Lead Free", Length=4.73mm, Max Current Rating=100A, Mount="Surface Mount,PCB", Number of Terminals=2, PackageDescription="Thru-Hole; 2 Leads", PackageReference=PIN-W2/E2.8, Packaging="Tape and Reel", Part number=MF-MSMF050-2, Pricing 1="2000=0.2898, 4000=0.28463, 6000=0.27945, 10000=0.2691 (USD)", Published=8-Jun-2000, Publisher="Altium Limited", Radiation Hardening=No, REACH SVHC="No SVHC", Stock 1=126000, Supplier 1=Digi-Key, Terminal Material=Gold, Termination=SMD/SMT, Time to Trip=0.15s, Voltage Rating=15V, Voltage Rating (DC)=15V, Width=3.41mm
J1: library part 1050170001, "CONN SM TH USB MICRO MODIFIED FOR DRILL", Part number=WM1399CT-ND, Supplier Part Number=609-4618-1-ND, Details="Modified from reference footprint for standard drill hits (rather than slots)", Supplier 1=Digi-Key
P1: library part "Header 3X2A", "Header, 3-Pin, Dual row", LatestRevisionDate=17-Jul-2002, LatestRevisionNote="Re-released for DXP Platform.", Publisher="Altium Limited"
R1 R2 R3 R4 R5 R7 R10 R11 R12: library part Res1, "Resistor", Case/Package=1206, Case Code (Metric)=3216, Manufacturer="Stackpole Electronics", Manufacturer Part Number=RNCP1206FTD1K00, Max Operating Temperature=155°C, Max Power Dissipation=500mW, Min Operating Temperature=-55°C, Resistance=1kR, Supplier Part Number=RMCF1206FT1K00CT-ND, Temperature Coefficient=100ppm/°C, Tolerance=1%, Case Code (Imperial)=1206, ComponentLink1Description=http://www.seielect.com/Catalog/SEI-rncp.pdf, ComponentLink1URL=http://www.seielect.com/Catalog/SEI-rncp.pdf, ComponentLink2Description=https://www.seielect.com/catalog/SEI-Packaging.pdf, ComponentLink2URL=https://www.seielect.com/catalog/SEI-Packaging.pdf, Composition="Thin Film", Contact Plating=Nickel,Tin,Matte, Height=0.024inch, Lead Free="Lead Free", Length=0.122inch, Mount="Surface Mount", Number of Terminations=2, Packaging="Tape and Reel", Pricing 1="1=0.1, 10=0.052, 100=0.0211, 1000=0.00949, 2500=0.00824 (USD)", Radiation Hardening=No, Stock 1=679, Supplier 1=Digi-Key, Width=0.059inch
R6: library part Res1, "Resistor", Case/Package=1206, Case Code (Metric)=3216, Manufacturer="TE Connectivity Holsworthy", Manufacturer Part Number=CRGH1206F16K9, Max Operating Temperature=125°C, Min Operating Temperature=-55°C, Number of Resistors=1, Power Rating=500mW, Resistance=16.9kR, Supplier Part Number=RMCF1206FT16K9CT-ND, Temperature Coefficient=100ppm/°C, Tolerance=1%, Voltage Rating=200V, Case Code (Imperial)=1206, ComponentLink1Description=https://datasheet.ciiva.com/12573/eng-ds-1773204-g-12573853.pdf, ComponentLink1URL=https://datasheet.ciiva.com/12573/eng-ds-1773204-g-12573853.pdf, Composition="Thick Film,Power resistor", ELV=Compliant, Height=0.55mm, Length=3.1mm, Mount="Surface Mount", Number of Terminations=2, Packaging="Tape and Reel", Supplier 1=Digi-Key, Termination=Solder, Width=1.55mm
R8: library part Res1, "Resistor", Case/Package=1206, Case Code (Metric)=3216, Manufacturer=Vishay, Manufacturer Part Number=CRCW1206120RFKEAHP, Max Operating Temperature=155°C, Min Operating Temperature=-55°C, Package Quantity=5000, Power Rating=500mW, Resistance=120R, Temperature Coefficient=100ppm/°C, Tolerance=1%, Voltage Rating=200V, Case Code (Imperial)=1206, ComponentLink1Description=https://datasheet.ciiva.com/8976/crcwhpe3-8976135.pdf, ComponentLink1URL=https://datasheet.ciiva.com/8976/crcwhpe3-8976135.pdf, ComponentLink2Description=https://datasheet.ciiva.com/48525/crcwhpe3-48525463.pdf, ComponentLink2URL=https://datasheet.ciiva.com/48525/crcwhpe3-48525463.pdf, ComponentLink3Description=https://datasheet.ciiva.com/7777/424479-7777433.pdf, ComponentLink3URL=https://datasheet.ciiva.com/7777/424479-7777433.pdf, ComponentLink4Description=https://datasheet.ciiva.com/7777/424479-7777434.pdf, ComponentLink4URL=https://datasheet.ciiva.com/7777/424479-7777434.pdf, Composition="Thick Film", Contact Plating=Tin, Depth=1.6mm, Height=0.5mm, Lead Free="Lead Free", Length=3.1mm, Military Standard=Not, Packaging="Tape and Reel", Radiation Hardening=No, REACH SVHC=Unknown, Stock 1=0, Supplier 1=Digi-Key, Supplier 2=Digi-Key, Termination=SMD/SMT, Voltage Rating (DC)=200V, Weight=0.000353oz, Width=1.6mm
R9: library part Res1, "Resistor", Case/Package=1206, Case Code (Metric)=3216, Manufacturer="Stackpole Electronics", Manufacturer Part Number=RNCP1206FTD10K0, Max Operating Temperature=155°C, Max Power Dissipation=500mW, Min Operating Temperature=-55°C, Resistance=10kR, Supplier Part Number=RNCP1206FTD10K0CT-ND, Temperature Coefficient=100ppm/°C, Tolerance=1%, Case Code (Imperial)=1206, ComponentLink1Description=http://www.seielect.com/Catalog/SEI-rncp.pdf, ComponentLink1URL=http://www.seielect.com/Catalog/SEI-rncp.pdf, Composition="Thin Film", Height=0.024inch, Length=0.122inch, Mount="Surface Mount", Number of Terminations=2, Packaging="Tape and Reel", Pricing 1="1=0.1, 10=0.052, 100=0.0211, 1000=0.00949, 2500=0.00824 (USD)", Stock 1=41487, Supplier 1=Digi-Key, Width=0.059inch
S1: "Switch", Manufacturer="ITT C&K", Manufacturer Part Number=KXT331LHS, Supplier Part Number=CKN10779CT-ND, ComponentLink1Description=https://www.ckswitches.com/media/1465/kxt3.pdf, ComponentLink1URL=https://www.ckswitches.com/media/1465/kxt3.pdf, ComponentLink2Description=http://www.ckswitches.com/media/1465/kxt3.pdf, ComponentLink2URL=http://www.ckswitches.com/media/1465/kxt3.pdf, LatestRevisionDate=17-Jul-2002, LatestRevisionNote="Re-released for DXP Platform.", PackageDescription="Switch; 2 Leads", PackageReference=SPST-2, Pricing 1="8500=0.1264 (USD)", Published=24-Mar-1999, Publisher="Altium Limited", Stock 1=42500, Supplier 1=Digi-Key
U1: "8-bit AVR Microcontroller, 32KB Flash, 1KB EEPROM, 2KB SRAM, 32-pin TQFP, Industrial Grade (-40°C to 85°C)", Supplier Part Number=ATMEGA328P-AU-ND, Code_JEDEC=MS-026-ABA, ComponentLink1Description="Manufacturer Link", ComponentLink1URL=http://www.atmel.com/products/avr/default.asp?, ComponentLink2Description="ATmega48A/48PA/88A/88PA/168A/168PA/328/328P Datasheet", ComponentLink2URL=http://www.atmel.com/dyn/resources/prod_documents/8271.pdf, ComponentLink3Description="ATmega48A/48PA/88A/88PA/168A/168PA/328/328P Summary", ComponentLink3URL=http://www.atmel.com/dyn/resources/prod_documents/8271S.pdf, ComponentLink4Description="Atmel.com Home", ComponentLink4URL=http://www.atmel.com, DatasheetVersion="revA, Jan-2010", PackageDescription="32-Lead, 7x7x1.0 mm Body, 0.8mm Lead Pitch, Thin Profile Plastic Quad Flat Package (TQFP)", PackageReference=32A, PackageVersion="revB, Oct-2001", Published=1-Apr-2010, Publisher="Altium Limited", Supplier 1=Digi-Key, Supplier 2=Farnell, Supplier 3=Mouser, Supplier Part Number 2=1715486, Supplier Part Number 3=556-ATMEGA328P-AU
U2: "800mA Low-Dropout Linear Regulator, 4-pin SOT-223", Manufacturer="National Semiconductor", PackageTopMarking=XYTT*N06B, PartNumber=LM1117IMPX-5.0/NOPBCT-ND, PowerWise=N, Supplier Part Number=296-21114-1-ND, Code_IPC=SOT223-4, Code_JEDEC=TO-261-AA, ComponentLink1Description="LM1117 Datasheet", ComponentLink1URL=http://www.national.com/ds/LM/LM1117.pdf, ComponentLink2Description="LM1117 Web Page", ComponentLink2URL=http://www.national.com/pf/LM/LM1117.html, ComponentLink3Description="MP04A Package Page", ComponentLink3URL=http://www.national.com/packaging/folders/mp04a.html, CompType="LDO IC", DatasheetVersion=Apr-2006, PackageDescription="Molded SOT-223, 6.50 x 3.56 x 1.6mm Body, 4 Lead, 2.3mm Pitch", PackageReference=MP04A, PackageVersion="revB, Apr-2003", PinCount=4, Published=1-Mar-2010, Publisher="Altium Limited", RoHS=N, Supplier 1=Digi-Key
U3: "SOIC", Supplier Part Number=MCP2551T-E/SNCT-ND, Supplier 1=Digi-Key
U4: "USB UART Asynchronous Serial Data Transfer Chip, SSOP-28, Tape and Reel", Case/Package=SSOP, Manufacturer=FTDI, Manufacturer Part Number=FT232RL-REEL, Max Operating Temperature=85°C, Max Supply Voltage=5.25V, Min Operating Temperature=-40°C, Min Supply Voltage=3.3V, Operating Supply Current=15mA, Package Quantity=2000, Supplier Part Number=768-1007-1-ND, Voltage=5V, ComponentLink1Description="Manufacturer Link", ComponentLink1URL=http://www.ftdichip.com/Products/ICs/FT232R.htm, ComponentLink2Description=Datasheet, ComponentLink2URL=http://www.ftdichip.com/Support/Documents/DataSheets/ICs/DS_FT232R.pdf, ComponentLink3Description=https://datasheet.ciiva.com/34304/2161019-34304054.pdf, ComponentLink3URL=https://datasheet.ciiva.com/34304/2161019-34304054.pdf, ComponentLink4Description=https://datasheet.ciiva.com/1787/ds-ft232r-1787047.pdf, ComponentLink4URL=https://datasheet.ciiva.com/1787/ds-ft232r-1787047.pdf, ComponentLink5Description=https://datasheet.ciiva.com/1787/ds-ft232r-1787048.pdf, ComponentLink5URL=https://datasheet.ciiva.com/1787/ds-ft232r-1787048.pdf, ComponentLink6Description=https://datasheet.ciiva.com/1787/ds-ft232r-1787049.pdf, ComponentLink6URL=https://datasheet.ciiva.com/1787/ds-ft232r-1787049.pdf, ComponentLink7Description=https://datasheet.ciiva.com/4787/ds-ft232r-11534-4787658.pdf, ComponentLink7URL=https://datasheet.ciiva.com/4787/ds-ft232r-11534-4787658.pdf, ComponentLink8Description=https://datasheet.ciiva.com/15150/getdatasheetpartid-643207-15150506.pdf, ComponentLink8URL=https://datasheet.ciiva.com/15150/getdatasheetpartid-643207-15150506.pdf, ComponentLink9Description=https://datasheet.ciiva.com/16200/ds-ft232r-16200652.pdf, ComponentLink9URL=https://datasheet.ciiva.com/16200/ds-ft232r-16200652.pdf, ComponentLink10Description=https://datasheet.ciiva.com/26841/ft232rl-reel-26841080.pdf, ComponentLink10URL=https://datasheet.ciiva.com/26841/ft232rl-reel-26841080.pdf, Data Rate=12Mbps, DatasheetVersion="ver 2.07, Jul-2010", Height=1.75mm, Interface=RS-232,RS-422,RS-485,UART, Lead Free="Lead Free", Length=10.2mm, Mount="Surface Mount", Number of Channels=1, Number of Pins=28, Number of Transceivers=1, PackageDescription="28-Pin Small Outline Package 0.65 mm Pitch", PackageReference=SSOP-28, PackageVersion=2010, Packaging="Tape and Reel", Pricing 1="1=4.5, 10=4.05, 100=3.65, 250=3.25, 500=2.85002, 1000=2.65 (USD)", Published=19-Aug-2010, Publisher="Altium Limited", Radiation Hardening=No, REACH SVHC="No SVHC", Stock 1=216496, Supplier 1=Digi-Key, Supplier 2=Digi-Key, Weight=0.080001oz, Width=5.3mm
U5: "SOIC", Supplier Part Number=MCP2515T-I/SOCT-ND, Supplier 1=Digi-Key
Y1 Y2: Capacitance=15pF, Case/Package=SMD/SMT, Frequency=16MHz, Frequency Stability=0.15%, Frequency Tolerance=0.5%, Manufacturer=Murata, Manufacturer Part Number=CSTCE16M0V53C-R0, Max Operating Temperature=125°C, Min Operating Temperature=-40°C, Package Quantity=3000, Supplier Part Number=490-17948-1-ND, ComponentLink1Description=https://datasheet.ciiva.com/16430/cstce16m0v53c-r0-16430704.pdf, ComponentLink1URL=https://datasheet.ciiva.com/16430/cstce16m0v53c-r0-16430704.pdf, ComponentLink2Description=https://datasheet.ciiva.com/14132/ceralock-eng-bro-14132709.pdf, ComponentLink2URL=https://datasheet.ciiva.com/14132/ceralock-eng-bro-14132709.pdf, ComponentLink3Description=https://datasheet.ciiva.com/29617/l0430e-29617948.pdf, ComponentLink3URL=https://datasheet.ciiva.com/29617/l0430e-29617948.pdf, ComponentLink4Description=https://datasheet.ciiva.com/29617/l0430e-29617949.pdf, ComponentLink4URL=https://datasheet.ciiva.com/29617/l0430e-29617949.pdf, ComponentLink5Description=https://datasheet.ciiva.com/29617/l0430e-29617950.pdf, ComponentLink5URL=https://datasheet.ciiva.com/29617/l0430e-29617950.pdf, ComponentLink6Description=https://datasheet.ciiva.com/26812/getdatasheetpartid-418508-26812063.pdf, ComponentLink6URL=https://datasheet.ciiva.com/26812/getdatasheetpartid-418508-26812063.pdf, Composition=Ceramic, Contact Plating=Gold, Height=0.031inch, Lead Free="Lead Free", Length=0.126inch, Mount="Surface Mount", Number of Pins=3, Packaging="Tape and Reel", REACH SVHC="No SVHC", Stock 1=0, Supplier 1=Digi-Key, Termination=SMD/SMT, Tolerance=0.5%, Width=0.051inch

## Via types
v1: diameter 0.5, hole 0.3, Top Layer to Bottom Layer, 52 vias
v2: diameter 0.5, hole 0.3, Top Layer to Bottom Layer, tented both sides, 47 vias
v3: diameter 1.5, hole 1.02, Top Layer to Bottom Layer, 16 vias
v4: diameter 0.5, hole 0.3, Top Layer to Bottom Layer, tented bottom, 14 vias
v5: diameter 4, hole 4, Top Layer to Bottom Layer, 2 vias
v6: diameter 0.5, hole 0.3, Top Layer to Bottom Layer, tented top, 2 vias

## Nets (pads, with @x,y where several pads share a name; then routed paths per layer and width w, separated by ;. In a path a pad name is that pad's centre, name@x,y a point inside that pad or via, vN(x,y) a via of type N, cw(c..) or ccw(c..) an arc to the next point about the centre after c; other vN are vias at no path point)
+3.3V: C7.1 U4.17 | length 7.2
  Top Layer w0.35: v1(152.675,69.05) 152.05,68.425 152.05,66.408 152.978,65.48 153.821,65.48 154.417,66.075 U4.17@155.7,66.075
+5V: C1.1 C2.1 C4.1 C5.1 C6.1 D2.1 D4.2 D6.1 D7.1 P1.4 R1.1 R7.1 R9.2 R10.2 U1.4 U1.6 U1.18 U2.2 U2.4 U3.3 U4.4 U4.20 U5.18 | length 119.4
  Top Layer w0.35: U4.4@148.8,71.275 150.117,71.275 v2(150.19,71.349) ; v2(154.051,68.377) 154.051,68.351 154.377,68.025 U4.20@155.7,68.025
  Top Layer w0.5: U1.4@137.369,58.937 140.438,58.937
  Top Layer w0.55: v2(133.25,80.395) 133.25,81.034 133.681,81.465 U3.3 ; U1.6 139.775,57.337 142.038,57.337 ; 140.438,58.937 142.038,57.337 ; U1.18@145.769,56.537 143.062,56.537 v1(142.95,56.425) 142.038,57.337
  Top Layer w1: U5.18@141.73,77.605 144.441,77.605 ccw(c144.441,77.759) 144.55,77.65 144.625,77.575 v1@145.325,77.575
  Bottom Layer w0.35: v1@149.375,77.369 149.375,76.924 149.375,76.691 149.983,76.083 C5.1@149.983,74.752 ; v2(154.051,68.377) 154.051,69.901 154.127,69.977
  Bottom Layer w1: R7.1 129.623,77.05 R10.2 131.359,77.1 131.719,77.46 133.914,77.46 134.229,77.775 ; P1.4 129.82,65.65 137.025,65.65 ; v2(133.25,80.395) 133.25,78.754 134.229,77.775 ; v4(141.725,77.6) 141.55,77.775 137.85,77.775 ; v1(142.95,56.425) v2(142.95,60.675) 142.95,63.525 141.937,64.538 ; C4.1@148.775,78 148.775,77.524 149.375,76.924 149.975,76.324 ; C6.1@149.972,71.855 149.972,74.222 C5.1@149.975,74.225 ; C6.1@150.009,72.034 150.009,71.403 150.772,70.64 153.464,70.64 154.127,69.977 154.554,69.55 156.918,69.55 157.387,70.018 157.387,70.1 158.136,70.85 D7.1@158.575,70.85 ; D6.1 157.8,64.125 156.324,62.649 D4.2 156.324,60.285 155.689,59.65 153.725,59.65 150.825,62.55 147,62.55 145.012,64.538 141.937,64.538 ; 134.229,77.775 137.85,77.775 ; 137.025,65.65 140.825,65.65 141.937,64.538 ; 137.025,65.65 137.025,76.95 137.85,77.775
  other v1: 145.43,76.497 146.438,76.497 147.446,76.497 148.454,76.497 149.462,76.497 145.43,77.575 146.438,77.575 147.446,77.575 148.454,77.575 149.462,77.575 145.43,78.686 146.438,78.686 147.446,78.686 148.454,78.686 149.462,78.686 145.38,79.737 146.388,79.737 147.396,79.737 148.404,79.737 149.412,79.737 145.419,81.11 146.427,81.11 147.435,81.11 148.443,81.11 149.451,81.11 144.381,82.269 147.405,82.269 148.413,82.269 152.888,83.606 153.907,83.606 144.42,83.643 147.369,83.643 148.555,83.643 152.888,84.575 153.907,84.575 151.908,84.6 147.369,84.964 148.555,85 151.908,85.567 152.88,85.567
+12V: C11.1 U2.3 | length 4.3
  Top Layer w1: U2.3@145.75,83.9 145.75,86.675 146.575,87.5 v3(146.95,87.5)
  other v1: 145.811,83.225
ADC0: U1.23
ADC1: U1.24
ADC2: U1.25 | length 21.6
  Top Layer w0.35: U1.25@144.369,62.737 145.999,62.737 147.741,60.995 148.555,60.995 v2(149.825,59.725)
  Bottom Layer w0.35: v3(147.608,46.775) 147.608,48.508 151.05,51.95 151.054,51.95 151.054,53.771 149.825,55 v2(149.825,59.725)
ADC3: U1.26 | length 22.1
  Top Layer w0.35: U1.26@143.569,62.737 143.569,61.606 v2(144.275,60.9) ; v2(150.375,52.9) 151.568,52.9 v2(152.15,53.482)
  Bottom Layer w0.35: v2(144.275,60.9) 144.4,60.775 144.4,57.675 147.725,54.35 149.312,54.35 150.375,53.287 v2(150.375,52.9) ; v3(150.275,47.725) 151.221,48.671 151.221,50.221 151.925,50.925 151.925,53.257 v2(152.15,53.482)
ADC4: U1.27 | length 22.8
  Top Layer w0.35: U1.27@142.769,62.737 142.769,63.567 143.312,64.11 145.404,64.11 147.599,61.915 147.608,61.915 147.938,61.585 149.131,61.585 150.575,60.141 v2(150.575,59.1)
  Bottom Layer w0.35: v2(150.575,59.1) 150.575,56.1 153.1,53.575 153.1,49.45 v3(152.675,49.025)
ADC5: U1.28 | length 23.8
  Top Layer w0.35: U1.28@141.969,62.737 141.969,63.567 143.102,64.7 145.601,64.7 148.126,62.175 149.375,62.175 151.425,60.125 v2(151.425,59.35)
  Bottom Layer w0.35: v2(151.425,59.35) 151.425,56.3 155.075,52.65 v3(155.075,50.45)
ADC6: U1.19 | length 14.2
  Top Layer w0.35: U1.19@145.769,57.337 146.687,57.337 147.15,57.8 149.955,57.8 150.968,56.787 v2(152.169,56.787)
  Bottom Layer w0.35: v2(152.169,56.787) 152.788,56.787 157.25,52.325 v3(157.25,52.1)
ADC7: U1.22 | length 15.8
  Top Layer w0.35: U1.22@145.769,59.737 148.853,59.737 150.765,57.825 v2(152.124,57.825)
  Bottom Layer w0.35: v2(152.124,57.825) 153,57.825 155.875,54.95 156.725,54.95 157.3,54.375 158.925,54.375 v3(159.2,54.1)
CANH: CANL.1 R8.1 U3.7 | length 13.2
  Top Layer w0.55: CANL.1 131.307,82.957 133.541,85.191 136.859,85.191 139.315,82.735 U3.7
  Bottom Layer w0.5: R8.1@138.637,83.275 139.162,82.75 v4(140.087,82.75)
CANL: CANL.2 R8.2 U3.6 | length 13
  Bottom Layer w0.5: R8.2@138.637,80.575 139.537,81.475 v4(140.087,81.475)
  Bottom Layer w0.55: CANL.2 129.575,80.8 131.826,80.8 133.101,82.075 136.95,82.075 R8.2
D0: R2.1 U1.30 | length 9.3
  Top Layer w0.55: U1.30@140.369,62.737 140.369,63.915 ; 140.373,63.915 140.373,64.376 v2(142.24,66.243)
  Bottom Layer w0.55: v2(142.24,66.243) 144.022,68.025 R2.1@146.525,68.025
D1: R3.1 U1.31 | length 10.9
  Top Layer w0.55: U1.31@139.569,62.737 139.569,64.944 140.589,65.964 v2(140.589,68.936)
  Bottom Layer w0.55: v2(140.589,68.936) 142.536,68.936 R3.1@144.15,70.55
D2/INTCAN: U1.32 U5.12 | length 10.1
  Top Layer w0.55: U1.32@138.765,62.737 138.765,65.689 139.548,66.472 139.548,69.418 140.114,69.985 U5.12@142.425,69.985
D3: U1.1
D4: U1.2
D5: U1.9 | length 22.1
  Top Layer w0.35: v2(130.381,52.503) 131.281,52.503 132.154,53.375 137.807,53.375 U1.9@138.769,54.337
  Bottom Layer w0.35: v2(130.381,52.503) 130.272,52.503 129.986,52.789 129.439,52.789 128.325,51.675 128.325,51.05 131.075,48.3 131.925,48.3 133.5,46.725 135.372,46.725 v3(135.947,47.3)
D6: U1.10 | length 13.9
  Top Layer w0.35: v2(131.475,51.3) 132.96,52.785 138.982,52.785 139.569,53.372 U1.10@139.569,54.337
  Bottom Layer w0.35: v2(131.475,51.3) 131.708,51.067 131.9,51.067 133.675,49.292 v3(133.675,48.362)
D7: U1.11 | length 11.2
  Top Layer w0.35: v3(131.625,49.675) 131.88,49.675 134.4,52.195 139.17,52.195 140.344,53.369 140.369,53.369 U1.11@140.369,54.337
D8: U1.12 | length 16.9
  Top Layer w0.35: v3(129.775,51.269) 129.775,49.737 131.281,48.231 131.877,48.231 135.096,51.45 139.725,51.45 141.169,52.894 U1.12@141.169,54.337
D9/CS: U1.13 U5.16 | length 58.7
  Top Layer w0.35: v3(127.875,53.075) 128.9,54.1 136.4,54.1 v2(137.15,54.85)
  Top Layer w0.55: U1.13@141.969,54.337 141.969,51.731 143.51,50.19 149.96,50.19 153.079,53.309 153.079,58.561 152.81,58.83 152.81,60.965 150.5,63.275 148.05,63.275 144.026,67.299 144.026,74.49 143.451,75.065 U5.16@142.425,75.065
  Bottom Layer w0.35: v2(137.15,54.85) v4(141.969,54.85)
D10: U1.14 | length 22.9
  Top Layer w0.55: U1.14@142.769,54.337 142.769,52.331 v2(143.9,51.2)
  Bottom Layer w0.55: v3(126.25,55.15) 128.223,55.15 128.423,54.95 129.049,54.95 130.545,53.454 131.329,52.67 132.799,51.2 v2(143.9,51.2)
D11/MOSI: P1.5 U1.15 U5.14 | length 52.6
  Top Layer w0.55: v3(124.663,57.2) 125.288,56.575 v2(131.725,56.575) ; v2(127.576,66.167) 128.222,66.167 130.374,64.015 P1.5 132.1,65.39 133.835,65.39 133.87,65.354 134.823,65.354 137.135,67.666 137.135,71.628 138.032,72.525 U5.14@142.425,72.525
  Bottom Layer w0.5: 132.254,56.071 134.229,54.096 142.821,54.096
  Bottom Layer w0.55: v3(124.663,57.2) 125.5,58.037 125.5,64.638 127.03,66.167 v2(127.576,66.167) ; v2(131.725,56.575) 132.229,56.071 132.254,56.071 ; 142.821,54.096 v4(143.575,54.85)
D12/MISO: P1.1 U1.16 U5.15 | length 58.6
  Top Layer w0.55: v3(123.55,59.85) 123.762,59.85 124.112,59.5 124.312,59.7 124.435,59.578 126.332,61.475 126.925,61.475 ; P1.1 126.925,61.475 ; U5.15@142.425,73.795 137.473,73.795 135.814,72.136 135.814,67.996 134.307,66.489 129.3,66.489 128.639,67.15 126.661,67.15 125.675,66.164 125.675,62.725 126.925,61.475 ; v2(144.369,52.294) U1.16@144.369,54.337
  Bottom Layer w0.5: P1.1 129.7,59.96 129.7,55.625 133.275,52.05
  Bottom Layer w0.55: 133.275,52.05 133.304,52.079 143.892,52.079 143.921,52.05 144.175,52.05 144.369,52.244 v2(144.369,52.294)
D13/SCK: P1.2 R4.2 U1.17 U5.13 | length 64.1
  Top Layer w0.55: v3(122.8,62.54) 122.8,62.122 122.125,61.447 122.125,59.333 122.858,58.6 125.337,58.6 126.199,59.462 129.797,59.462 129.834,59.425 130.725,60.316 P1.2 ; v2(131.826,55.067) 133.1,56.341 133.1,58.627 135.103,60.63 135.103,64.008 138.43,67.335 138.43,70.536 139.149,71.255 U5.13@142.425,71.255
  Bottom Layer w0.55: P1.2 130.725,56.125 133.775,53.075 143.875,53.075 145.225,54.425 v4(145.225,55.725) 147.775,53.175 R4.2@148.5,53.175
GND: C1.2 C2.2 C3.2 C4.2 C5.2 C6.2 C7.2 C9.2 C10.2 C11.2 D1.2 J1.5 P1.6 R5.2 R6.1 S1.2 U1.3 U1.5 U1.21 U2.1 U3.2 U4.7 U4.18 U4.21 U4.25 U4.26 U5.9 Y1.2 Y2.2 | length 18.4
  Top Layer w0.35: v2(154.051,72.034) 154.16,71.925 U4.26@155.7,71.925
  Top Layer w1: U2.1@150.35,83.9 150.35,87.55
  Bottom Layer w1: v1(150.325,84.575) 150.325,83.225 v1(150.35,83.2) 151.924,82.775 ; 151.925,82.775 153.425,81.125 153.425,79.787 151.638,78 151.475,78 152.515,76.96 152.515,74.921 C5.2@152.683,74.752
  other v1: 151.228,66.858
  other v2: 138.025,47.925 145.225,49.025 140.85,49.525 145.811,53.475 134.633,57.275 128.325,57.949 137.2,63.806 146.575,66.8 152.683,66.8 157.182,68.05 123.15,68.525 125.1,70.575 145.65,72.161 123.9,72.517 135.175,74.525 162.125,75.271 150.325,87.1
  other v4: 137.897,58.141 145.486,58.958 136.855,59.741 129.025,69.95
NetC3_1: C3.1 U1.20 | length 3.7
  Bottom Layer w0.35: C3.1@148.375,58.3 C3.1@148.5,58.425
  Bottom Layer w0.55: v4(145.225,58.125) 145.604,57.746 147.821,57.746 C3.1@148.375,58.3
NetC8_2: C8.2 U4.19 | length 3.2
  Top Layer w0.35: U4.19@155.7,67.375 157.847,67.375 C8.2
NetD1_1: D1.1 R4.1
  other v1: 148.5,56.15
NetD2_2: D2.2 R5.1
  other v1: 156.125,81.125
NetD3_1: D3.1 R7.2
  other v1: 126.773,73.85
NetD3_2: D3.2 U3.1 U5.1 | length 16
  Top Layer w0.35: D3.2 D3.2@126.773,77.373